# EAGLE board 16-Sensors(Board) (EAGLE 7.1.0)
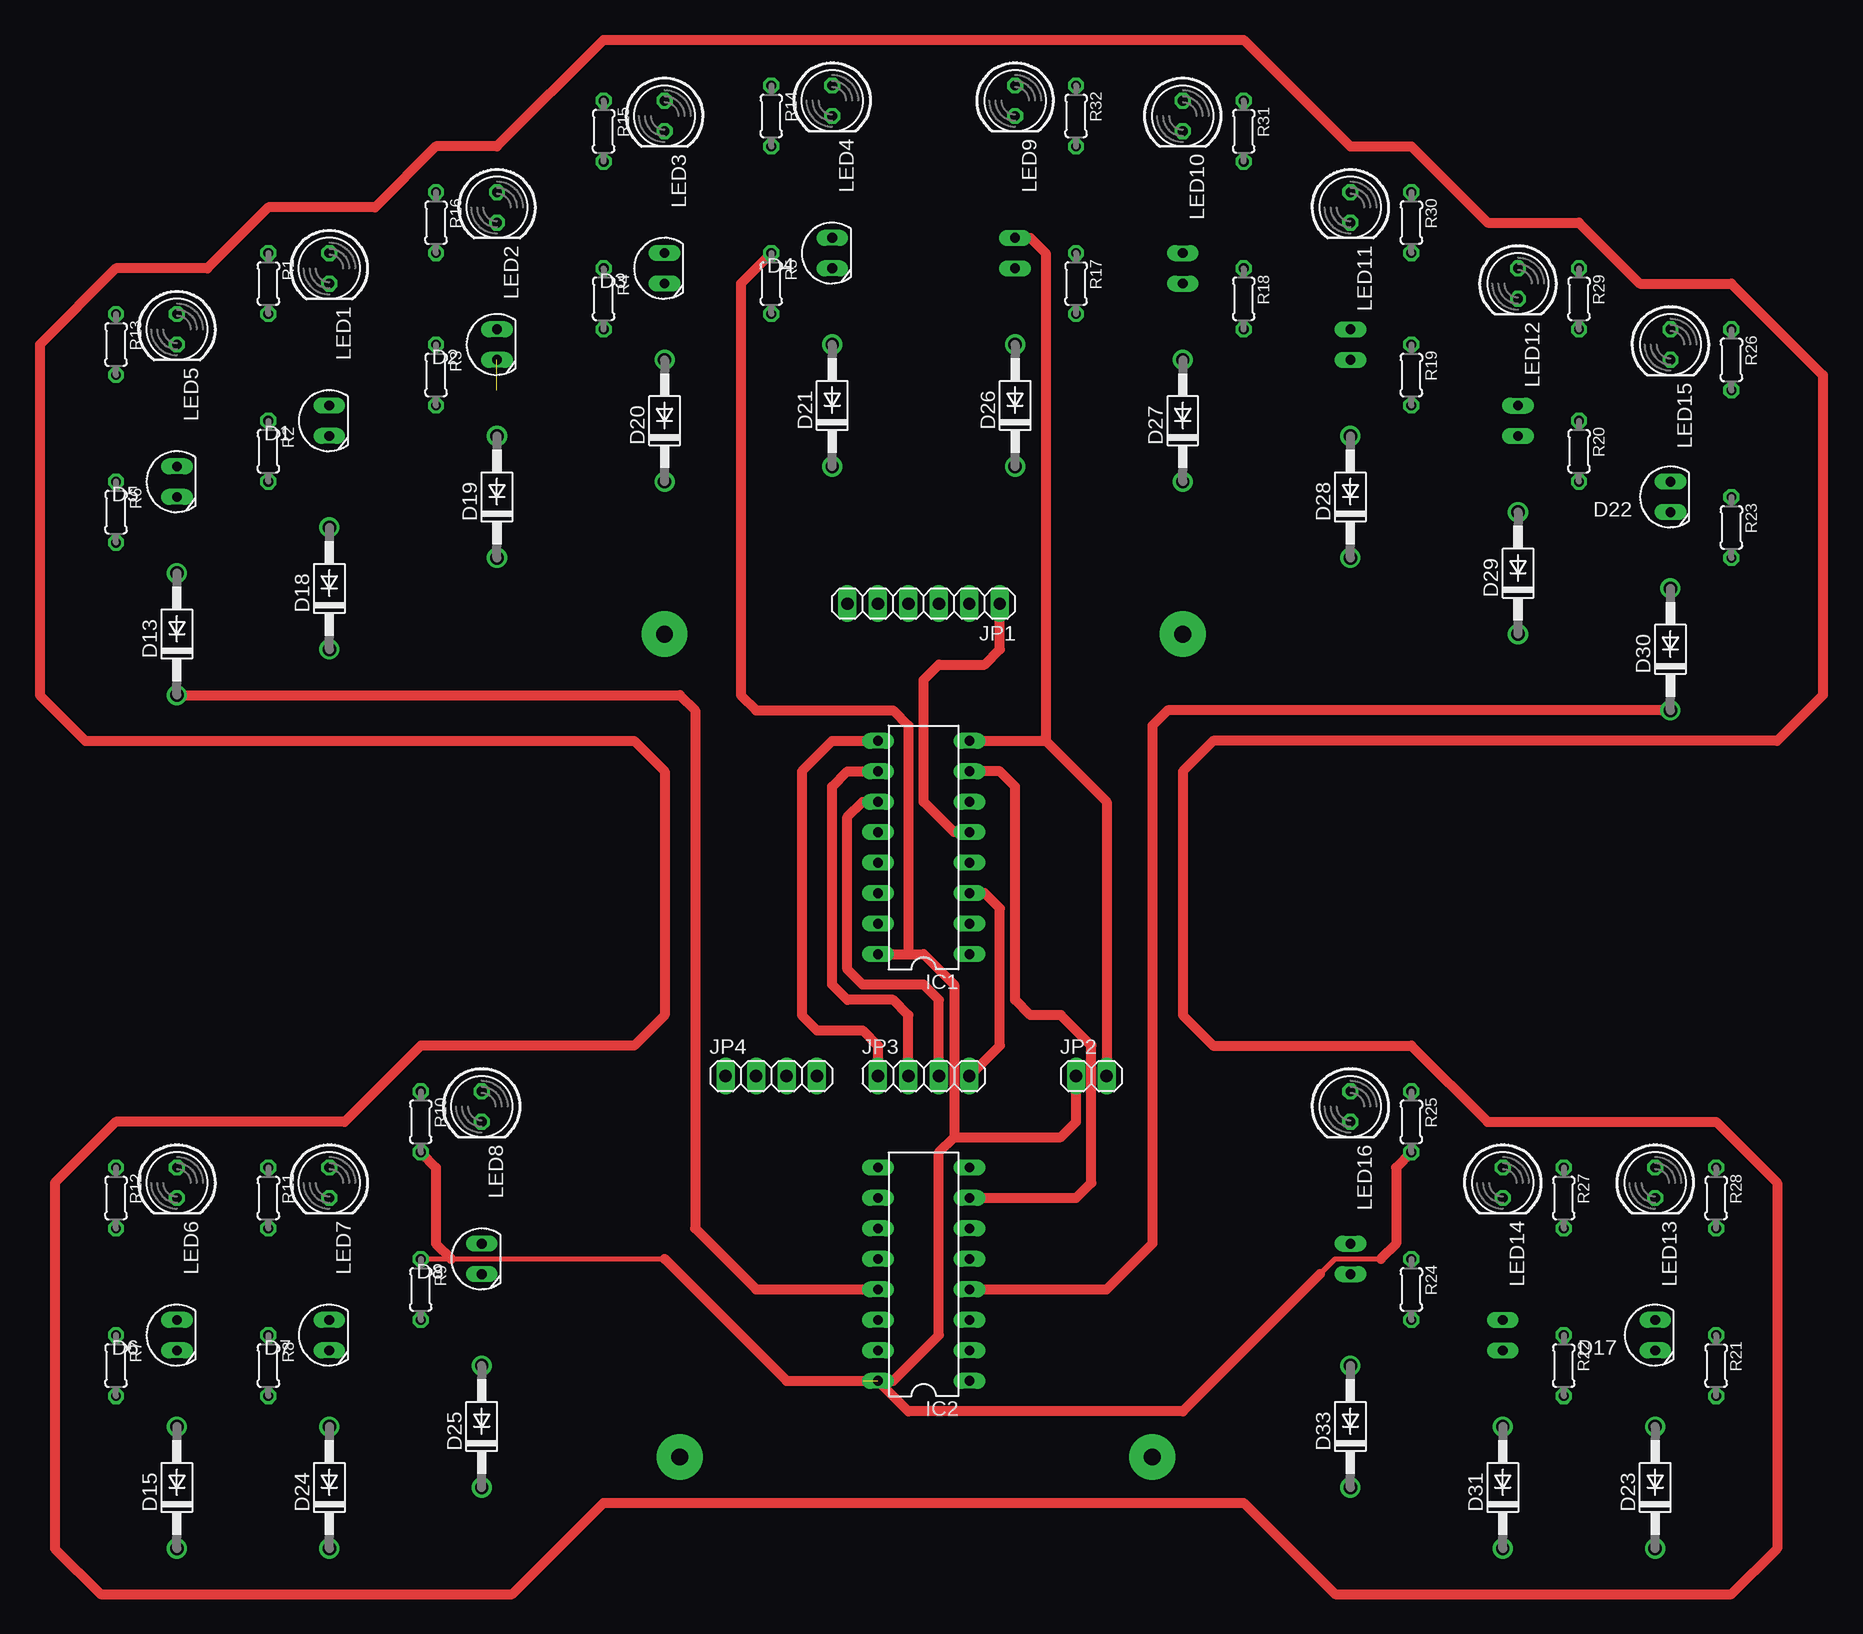
[diagram p0: board, top side]
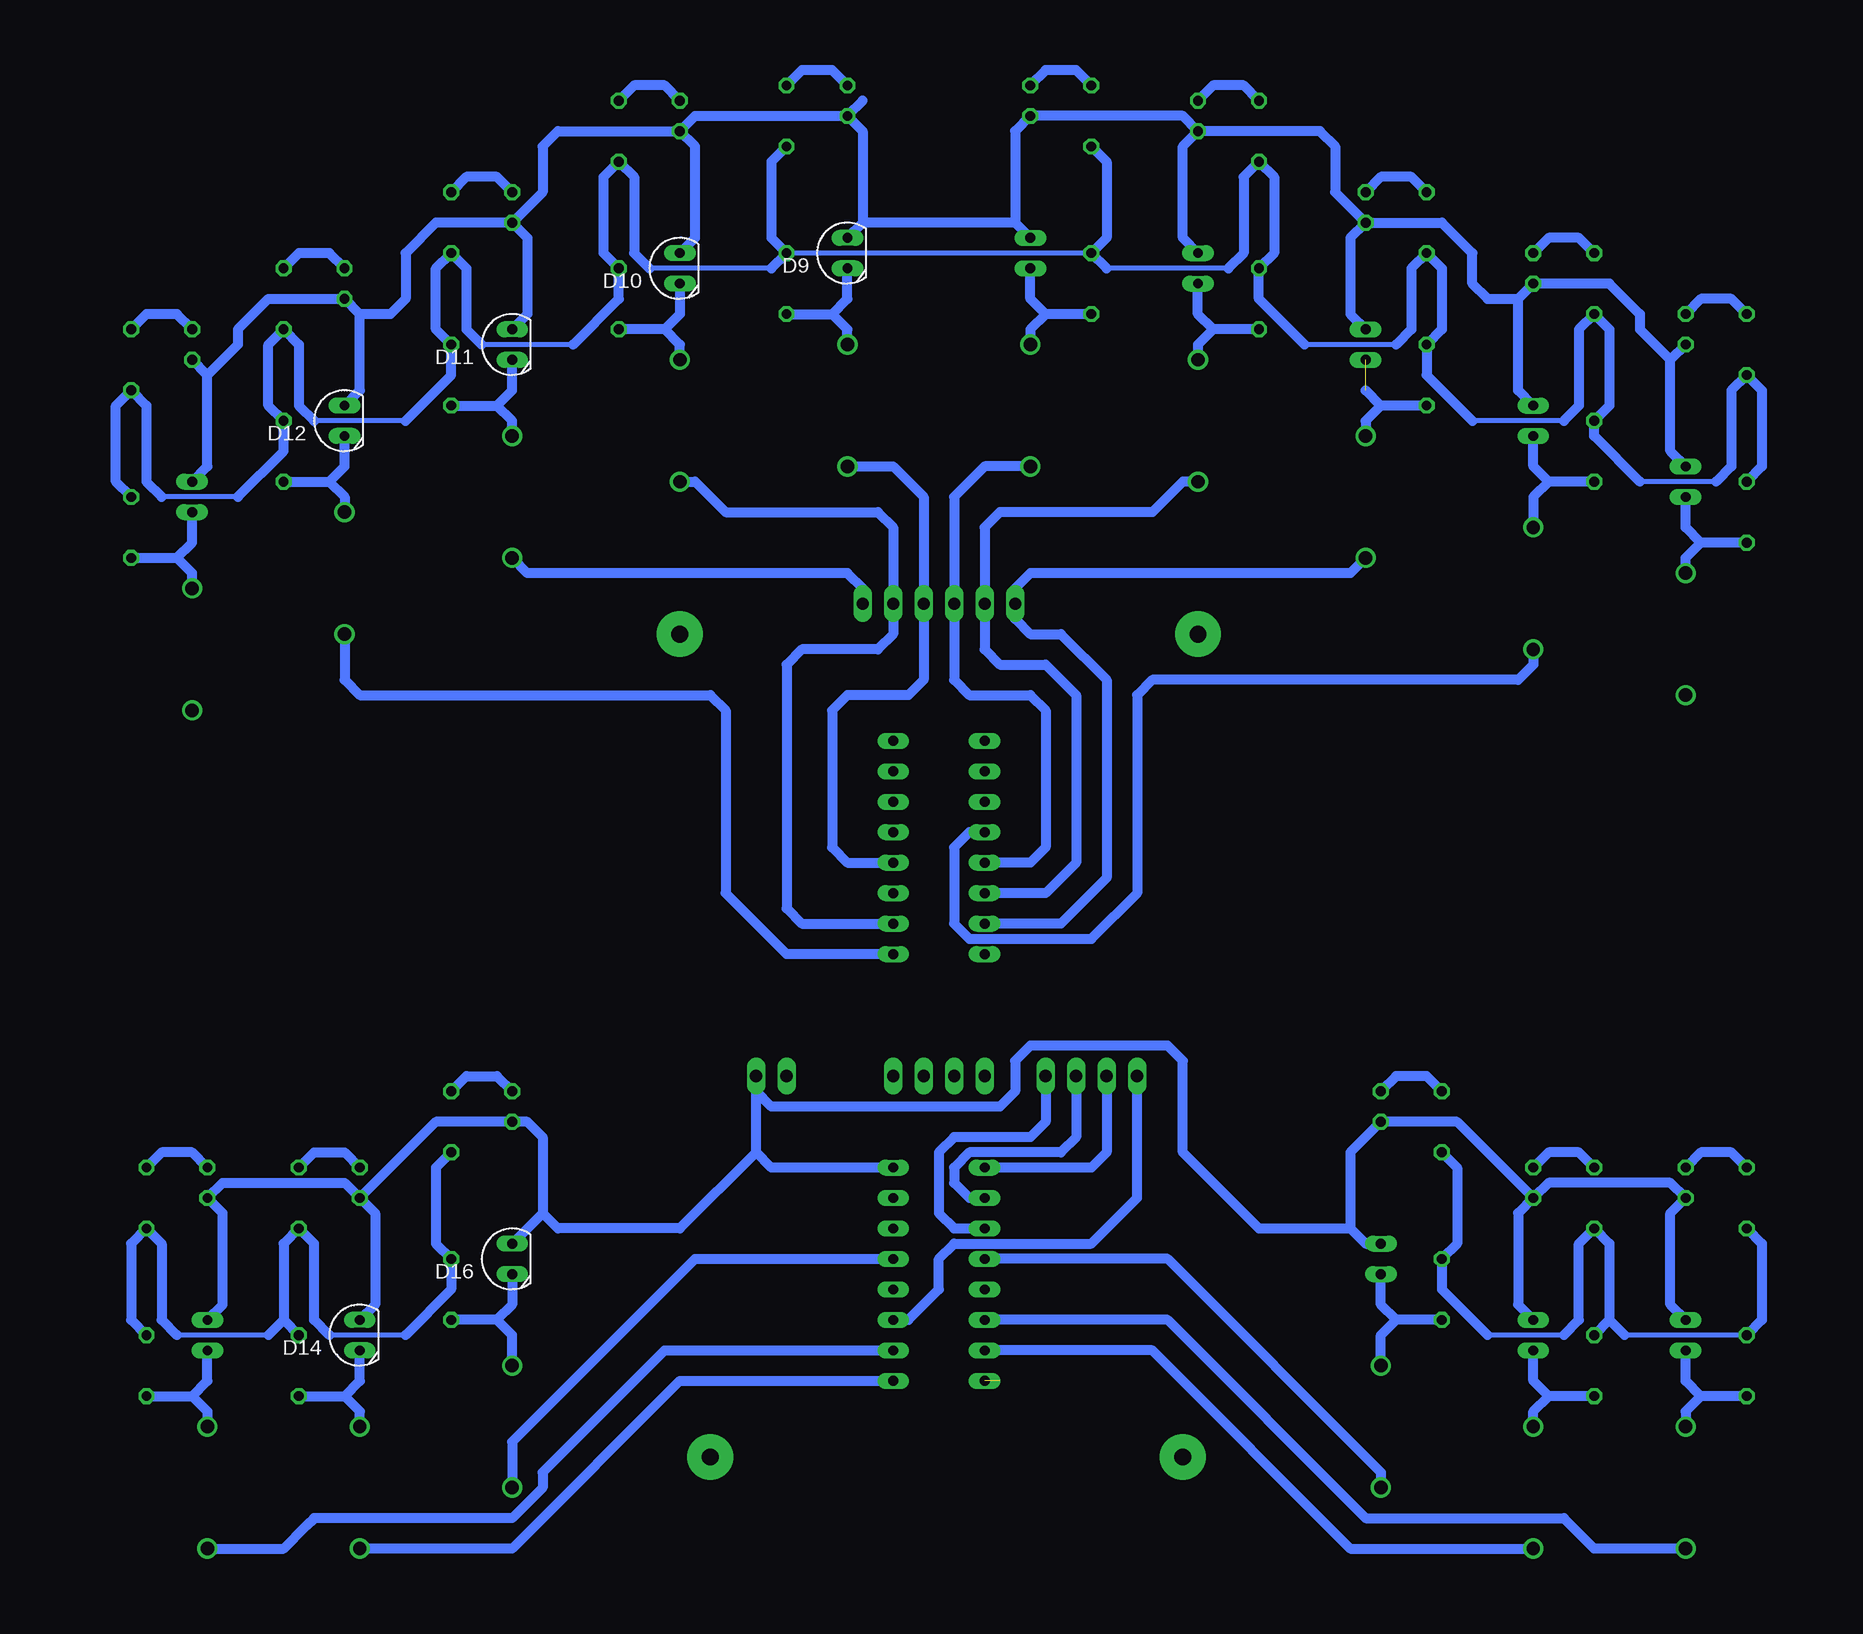
[diagram p1: board, bottom side, seen from below]

No outline drawn. Coordinates in mm, seen from the top.
Copper layers (1*16): Top 0.035mm / dielectric 1.5mm / Bottom 0.035mm
Design rules "default": minimum track width 10mil, minimum drill 24mil, track to track 8mil, track to pad 8mil, pad to pad 8mil, via to via 8mil, smd to smd 8mil, copper to edge 40mil, drill to drill 8mil, minimum pad ring 10mil, minimum via ring 8mil, stop-mask expansion 4mil, vias tented up to drill 0mil, thermal gap 10mil

## Footprints (pad centres in the part's own frame; a part is rotated, then mirrored left to right if it is on the bottom)
SFH205 = drill 0.813 long: A 0,-1.27; K 0,1.27
DO41-10 = drill 1.118: A 5.08,0; C -5.08,0
DIL16 = drill 0.813 long: 1 -8.89,-3.81; 2 -6.35,-3.81; 3 -3.81,-3.81; 4 -1.27,-3.81; 5 1.27,-3.81; 6 3.81,-3.81; 7 6.35,-3.81; 8 8.89,-3.81; 9 8.89,3.81; 10 6.35,3.81; 11 3.81,3.81; 12 1.27,3.81; 13 -1.27,3.81; 14 -3.81,3.81; 15 -6.35,3.81; 16 -8.89,3.81
1X06 = drill 1.016 long: 1 -6.35,0; 2 -3.81,0; 3 -1.27,0; 4 1.27,0; 5 3.81,0; 6 6.35,0
1X02 = drill 1.016 long: 1 -1.27,0; 2 1.27,0
1X04 = drill 1.016 long: 1 -3.81,0; 2 -1.27,0; 3 1.27,0; 4 3.81,0
LED5MM = drill 0.813 octagon: A -1.27,0; K 1.27,0
0204/5 = drill 0.813 octagon: 1 -2.54,0; 2 2.54,0

## Placement (x,y rotation side)
D1  SFH205  [SFH205]  30.48,64.77 180 top
D2  SFH205  [SFH205]  44.45,71.12 180 top
D3  SFH205  [SFH205]  58.42,77.47 180 top
D4  SFH205  [SFH205]  72.39,78.74 180 top
D5  SFH205  [SFH205]  17.78,59.69 180 top
D6  SFH205  [SFH205]  17.78,-11.43 180 top
D7  SFH205  [SFH205]  30.48,-11.43 180 top
D8  SFH205  [SFH205]  43.18,-5.08 180 top
D9  SFH205  [SFH205]  87.63,78.74 180 bottom
D10  SFH205  [SFH205]  101.6,77.47 180 bottom
D11  SFH205  [SFH205]  115.57,71.12 180 bottom
D12  SFH205  [SFH205]  129.54,64.77 180 bottom
D13  1N4004  [DO41-10]  17.78,46.99 90 top
D14  SFH205  [SFH205]  128.27,-11.43 180 bottom
D15  1N4004  [DO41-10]  17.78,-24.13 90 top
D16  SFH205  [SFH205]  115.57,-5.08 180 bottom
D17  SFH205  [SFH205]  140.97,-11.43 180 top
D18  1N4004  [DO41-10]  30.48,50.8 90 top
D19  1N4004  [DO41-10]  44.45,58.42 90 top
D20  1N4004  [DO41-10]  58.42,64.77 90 top
D21  1N4004  [DO41-10]  72.39,66.04 90 top
D22  SFH205  [SFH205]  142.24,58.42 180 top
D23  1N4004  [DO41-10]  140.97,-24.13 90 top
D24  1N4004  [DO41-10]  30.48,-24.13 90 top
D25  1N4004  [DO41-10]  43.18,-19.05 90 top
D26  1N4004  [DO41-10]  87.63,66.04 90 top
D27  1N4004  [DO41-10]  101.6,64.77 90 top
D28  1N4004  [DO41-10]  115.57,58.42 90 top
D29  1N4004  [DO41-10]  129.54,52.07 90 top
D30  1N4004  [DO41-10]  142.24,45.72 90 top
D31  1N4004  [DO41-10]  128.27,-24.13 90 top
D33  1N4004  [DO41-10]  115.57,-19.05 90 top
IC1  4051N  [DIL16]  80.01,29.21 90 top
IC2  4051N  [DIL16]  80.01,-6.35 90 top
JP1  [1X06]  80.01,49.53 180 top
JP2  [1X02]  93.98,10.16 0 top
JP3  [1X04]  80.01,10.16 0 top
JP4  [1X04]  67.31,10.16 0 top
LED1  [LED5MM]  30.48,77.47 270 top
LED2  [LED5MM]  44.45,82.55 270 top
LED3  [LED5MM]  58.42,90.17 270 top
LED4  [LED5MM]  72.39,91.44 270 top
LED5  [LED5MM]  17.78,72.39 270 top
LED6  [LED5MM]  17.78,1.27 270 top
LED7  [LED5MM]  30.48,1.27 270 top
LED8  [LED5MM]  43.18,7.62 270 top
LED9  [LED5MM]  87.63,91.44 270 top
LED10  [LED5MM]  101.6,90.17 270 top
LED11  [LED5MM]  115.57,82.55 270 top
LED12  [LED5MM]  129.54,76.2 270 top
LED13  [LED5MM]  140.97,1.27 270 top
LED14  [LED5MM]  128.27,1.27 270 top
LED15  [LED5MM]  142.24,71.12 270 top
LED16  [LED5MM]  115.57,7.62 270 top
R1  [0204/5]  25.4,76.2 270 top
R2  [0204/5]  25.4,62.23 270 top
R3  [0204/5]  39.37,68.58 270 top
R4  [0204/5]  53.34,74.93 270 top
R5  [0204/5]  67.31,76.2 270 top
R6  [0204/5]  12.7,57.15 270 top
R7  [0204/5]  12.7,-13.97 270 top
R8  [0204/5]  25.4,-13.97 270 top
R9  [0204/5]  38.1,-7.62 270 top
R10  [0204/5]  38.1,6.35 270 top
R11  [0204/5]  25.4,0 270 top
R12  [0204/5]  12.7,0 270 top
R13  [0204/5]  12.7,71.12 270 top
R14  [0204/5]  67.31,90.17 270 top
R15  [0204/5]  53.34,88.9 270 top
R16  [0204/5]  39.37,81.28 270 top
R17  [0204/5]  92.71,76.2 270 top
R18  [0204/5]  106.68,74.93 270 top
R19  [0204/5]  120.65,68.58 270 top
R20  [0204/5]  134.62,62.23 270 top
R21  [0204/5]  146.05,-13.97 270 top
R22  [0204/5]  133.35,-13.97 270 top
R23  [0204/5]  147.32,55.88 270 top
R24  [0204/5]  120.65,-7.62 270 top
R25  [0204/5]  120.65,6.35 270 top
R26  [0204/5]  147.32,69.85 270 top
R27  [0204/5]  133.35,0 270 top
R28  [0204/5]  146.05,0 270 top
R29  [0204/5]  134.62,74.93 270 top
R30  [0204/5]  120.65,81.28 270 top
R31  [0204/5]  106.68,88.9 270 top
R32  [0204/5]  92.71,90.17 270 top

## Library data of the parts
D1-D12 D14 D16 D17 D22 = opto-trans-siemens; OC_FARNELL: unknown; OC_NEWARK: unknown
D13 D15 D18-D21 D23-D31 D33 = diode
IC1 IC2 = 40xx
JP1-JP4 = pinhead
LED1-LED16 = led
R1-R32 = rcl

## Nets
GND: D1.A D2.A D3.A D4.A D5.A D6.A D7.A D8.A D9.A D10.A D11.A D12.A D14.A D16.A D17.A D22.A IC1.8 IC2.8 JP2.2 LED1.K LED2.K LED3.K LED4.K LED5.K LED6.K LED7.K LED8.K LED9.K LED10.K LED11.K LED12.K LED13.K LED14.K LED15.K LED16.K
N$1: LED9.A R32.1
N$2: LED10.A R31.1
N$3: LED11.A R30.1
N$4: LED12.A R29.1
N$5: D26.C IC1.4 JP1.3
N$6: LED14.A R27.1
N$7: D21.C IC1.13 JP1.4
N$8: D20.C IC1.14 JP1.5
N$9: LED1.A R1.1
N$10: LED2.A R16.1
N$11: LED3.A R15.1
N$12: LED4.A R14.1
N$13: D27.C IC1.2 JP1.2
N$14: D19.C IC1.15 JP1.6
N$15: D18.C IC1.12
N$17: D28.C IC1.5 JP1.1
N$18: D3.K D20.A R4.2
N$19: IC1.3 JP3.4
N$20: D29.C IC1.1
N$21: IC1.11 JP3.3
N$22: IC1.10 JP3.2
N$23: LED5.A R13.1
N$24: IC1.9 JP3.1
N$25: LED7.A R11.1
N$26: LED8.A R10.1
N$27: D5.K D13.A R6.2
N$28: D6.K D15.A R7.2
N$29: LED6.A R12.1
N$30: LED13.A R28.1
N$31: D17.K D23.A R21.2
N$32: D16.K D33.A R24.2
N$33: D22.K D30.A R23.2
N$34: LED15.A R26.1
N$35: D31.C IC2.1
N$36: D33.C IC2.5
N$38: D30.C IC2.4
N$39: D25.C IC2.12
N$40: D24.C IC2.15
N$41: D15.C IC2.14
N$42: D13.C IC2.13
N$43: IC2.3 JP4.1
N$44: IC2.9 JP4.2
N$45: IC2.10 JP4.3
N$46: IC2.11 JP4.4
N$47: D1.K D18.A R2.2
N$48: D2.K D19.A R3.2
N$49: D23.C IC2.2
N$50: D4.K D21.A R5.2
N$53: D7.K D24.A R8.2
N$54: D8.K D25.A R9.2
N$55: D9.K D26.A R17.2
N$56: D10.K D27.A R18.2
N$57: D11.K D28.A R19.2
N$58: D12.K D29.A R20.2
N$60: D14.K D31.A R22.2
N$62: LED16.A R25.1
VCC: IC1.16 IC2.16 JP2.1 R1.2 R2.1 R3.1 R4.1 R5.1 R6.1 R7.1 R8.1 R9.1 R10.2 R11.2 R12.2 R13.2 R14.2 R15.2 R16.2 R17.1 R18.1 R19.1 R20.1 R21.1 R22.1 R23.1 R24.1 R25.2 R26.2 R27.2 R28.2 R29.2 R30.2 R31.2 R32.2
VEE: IC1.7 IC2.7

## Tracks (layer width: path | path; a pad name or v marks a point on that pad's centre or on a via)
GND
  Top 0.813: IC1.8 90.17,38.1 | 90.17,38.1 95.25,33.02 JP2.2 | D9.A 88.9,80.01 90.17,78.74 90.17,38.1
  Bottom 0.813: D11.A 114.3,73.66 114.3,80.01 LED11.K | D10.A 100.33,80.01 100.33,87.63 LED10.K | LED9.K 86.36,88.9 86.36,81.28 | 86.36,81.28 D9.A | 73.66,81.28 73.66,88.9 LED4.K 59.69,90.17 LED3.K | 73.66,81.28 D4.A | D3.A 59.69,80.01 59.69,87.63 LED3.K | D2.A 45.72,73.66 45.72,80.01 LED2.K | LED3.K 48.26,88.9 46.99,87.63 46.99,83.82 LED2.K | 86.36,91.44 LED9.K | LED10.K 111.76,88.9 113.03,87.63 113.03,83.82 LED11.K | LED10.K 100.33,90.17 LED9.K | LED7.K 31.75,-1.27 31.75,-8.89 D7.A | LED14.K 127,-1.27 127,-8.89 D14.A | D1.A 31.75,67.31 31.75,74.93 | 31.75,74.93 LED1.K 24.13,76.2 21.59,73.66 21.59,72.39 19.05,69.85 | D12.A 128.27,67.31 128.27,73.66 | 128.27,73.66 LED12.K 135.89,74.93 138.43,72.39 138.43,71.12 140.97,68.58 | LED7.K 36.83,6.35 LED8.K 45.72,3.81 45.72,-2.54 | LED14.K 121.92,6.35 LED16.K 114.3,6.35 113.03,5.08 113.03,-1.27 | 128.27,73.66 125.73,73.66 124.46,74.93 124.46,78.74 121.92,81.28 LED11.K | D16.A 113.03,-1.27 | 45.72,-2.54 44.45,-3.81 D8.A | D6.A 19.05,-8.89 19.05,-1.27 LED6.K 19.05,1.27 29.21,1.27 LED7.K | LED5.K 19.05,69.85 | D5.A 19.05,62.23 19.05,69.85 | D22.A 140.97,60.96 140.97,68.58 | 140.97,68.58 LED15.K | D17.A 139.7,-8.89 139.7,-1.27 LED13.K 139.7,1.27 129.54,1.27 LED14.K | 73.66,81.28 86.36,81.28 | IC2.8 93.98,2.54 95.25,3.81 | 95.25,3.81 95.25,8.89 | 95.25,8.89 JP2.2 | 113.03,-1.27 111.76,-2.54 101.6,-2.54 95.25,3.81 | 95.25,8.89 93.98,7.62 74.93,7.62 73.66,8.89 73.66,11.43 72.39,12.7 60.96,12.7 59.69,11.43 59.69,3.81 53.34,-2.54 45.72,-2.54 | LED2.K 38.1,81.28 35.56,78.74 35.56,76.2 34.29,74.93 31.75,74.93
N$1
  Bottom 0.813: LED9.A 88.9,93.98 91.44,93.98 R32.1
N$2
  Bottom 0.813: LED10.A 102.87,92.71 105.41,92.71 R31.1
N$3
  Bottom 0.813: LED11.A 116.84,85.09 119.38,85.09 R30.1
N$4
  Bottom 0.813: LED12.A 130.81,78.74 133.35,78.74 R29.1
N$5
  Bottom 0.813: D26.C 83.82,60.96 81.28,58.42 JP1.3 81.28,43.18 82.55,41.91 87.63,41.91 88.9,40.64 88.9,29.21 87.63,27.94 IC1.4
N$6
  Bottom 0.813: R27.1 132.08,3.81 129.54,3.81 LED14.A
N$7
  Bottom 0.813: D21.C 76.2,60.96 78.74,58.42 JP1.4 78.74,43.18 77.47,41.91 72.39,41.91 71.12,40.64 71.12,29.21 72.39,27.94 IC1.13
N$8
  Bottom 0.813: D20.C 59.69,59.69 62.23,57.15 74.93,57.15 76.2,55.88 JP1.5 76.2,45.72 74.93,44.45 71.12,44.45 68.58,41.91 68.58,27.94 71.12,25.4 IC1.14
N$9
  Bottom 0.813: R1.1 26.67,80.01 29.21,80.01 LED1.A
N$10
  Bottom 0.813: R16.1 40.64,85.09 43.18,85.09 LED2.A
N$11
  Bottom 0.813: R15.1 54.61,92.71 57.15,92.71 LED3.A
N$12
  Bottom 0.813: R14.1 68.58,93.98 71.12,93.98 LED4.A
N$13
  Bottom 0.813: D27.C 100.33,59.69 97.79,57.15 85.09,57.15 83.82,55.88 JP1.2 83.82,46.99 85.09,45.72 91.44,45.72 92.71,44.45 92.71,24.13 91.44,22.86 IC1.2
N$14
  Bottom 0.813: D19.C 45.72,52.07 72.39,52.07 73.66,50.8 JP1.6 73.66,48.26 72.39,46.99 69.85,46.99 66.04,43.18 66.04,26.67 69.85,22.86 IC1.15
N$15
  Bottom 0.813: IC1.12 77.47,30.48 78.74,29.21 78.74,22.86 77.47,21.59 67.31,21.59 63.5,25.4 63.5,41.91 62.23,43.18 31.75,43.18 30.48,44.45 D18.C
N$17
  Top 0.813: IC1.5 82.55,30.48 80.01,33.02 80.01,43.18 81.28,44.45 85.09,44.45 86.36,45.72 JP1.1
  Bottom 0.813: D28.C 114.3,52.07 87.63,52.07 86.36,50.8 JP1.1
N$18
  Bottom 0.813: R4.2 57.15,72.39 | 57.15,72.39 58.42,73.66 D3.K | 57.15,72.39 58.42,71.12 D20.A
N$19
  Top 0.813: JP3.4 86.36,12.7 86.36,24.13 85.09,25.4 IC1.3
N$20
  Bottom 0.813: IC1.1 92.71,20.32 97.79,25.4 97.79,40.64 99.06,41.91 128.27,41.91 129.54,43.18 D29.C
N$21
  Top 0.813: JP3.3 81.28,16.51 80.01,17.78 74.93,17.78 73.66,19.05 73.66,31.75 74.93,33.02 IC1.11
N$22
  Top 0.813: JP3.2 78.74,15.24 77.47,16.51 73.66,16.51 72.39,17.78 72.39,34.29 73.66,35.56 IC1.10
N$23
  Bottom 0.813: R13.1 13.97,74.93 16.51,74.93 LED5.A
N$24
  Top 0.813: JP3.1 76.2,12.7 74.93,13.97 71.12,13.97 69.85,15.24 69.85,35.56 72.39,38.1 IC1.9
N$25
  Bottom 0.813: R11.1 26.67,3.81 29.21,3.81 LED7.A
N$26
  Bottom 0.813: R10.1 39.37,10.16 41.91,10.16 LED8.A
N$27
  Bottom 0.813: R6.2 16.51,54.61 | 16.51,54.61 17.78,55.88 D5.K | D13.A 17.78,53.34 16.51,54.61
N$28
  Bottom 0.813: R7.2 16.51,-16.51 | 16.51,-16.51 17.78,-15.24 D6.K | 16.51,-16.51 17.78,-17.78 D15.A
N$29
  Bottom 0.813: R12.1 13.97,3.81 16.51,3.81 LED6.A
N$30
  Bottom 0.813: LED13.A 142.24,3.81 144.78,3.81 R28.1
N$31
  Bottom 0.813: R21.2 142.24,-16.51 | 142.24,-16.51 140.97,-15.24 D17.K | 142.24,-16.51 140.97,-17.78 D23.A
N$32
  Bottom 0.813: D16.K 115.57,-8.89 116.84,-10.16 | 116.84,-10.16 R24.2 | D33.A 115.57,-11.43 116.84,-10.16
N$33
  Bottom 0.813: R23.2 143.51,53.34 | 143.51,53.34 142.24,54.61 D22.K | D30.A 142.24,52.07 143.51,53.34
N$34
  Bottom 0.813: LED15.A 143.51,73.66 146.05,73.66 R26.1
N$35
  Bottom 0.813: IC2.1 101.6,-15.24 115.57,-29.21 D31.C
N$36
  Bottom 0.813: IC2.5 100.33,-5.08 115.57,-20.32 D33.C
N$37
  Top 0.813: 53.34,96.52 106.68,96.52 115.57,87.63 120.65,87.63 127,81.28 134.62,81.28 139.7,76.2 147.32,76.2 154.94,68.58 154.94,41.91 151.13,38.1 104.14,38.1 101.6,35.56 101.6,15.24 104.14,12.7 120.65,12.7 127,6.35 146.05,6.35 151.13,1.27 151.13,-29.21 147.32,-33.02 114.3,-33.02 106.68,-25.4 53.34,-25.4 45.72,-33.02 11.43,-33.02 7.62,-29.21 7.62,1.27 12.7,6.35 31.75,6.35 38.1,12.7 55.88,12.7 58.42,15.24 58.42,35.56 55.88,38.1 10.16,38.1 6.35,41.91 6.35,71.12 12.7,77.47 20.32,77.47 25.4,82.55 34.29,82.55 39.37,87.63 44.45,87.63 53.34,96.52
N$38
  Top 0.813: IC2.4 95.25,-7.62 99.06,-3.81 99.06,39.37 100.33,40.64 D30.C
N$39
  Bottom 0.813: IC2.12 60.96,-5.08 43.18,-22.86 D25.C
N$40
  Bottom 0.813: IC2.15 62.23,-12.7 45.72,-29.21 D24.C
N$41
  Bottom 0.813: D15.C 25.4,-29.21 27.94,-26.67 44.45,-26.67 60.96,-10.16 IC2.14
N$42
  Top 0.813: IC2.13 66.04,-7.62 60.96,-2.54 60.96,40.64 59.69,41.91 D13.C
N$43
  Bottom 0.813: IC2.3 82.55,-10.16 80.01,-7.62 80.01,-5.08 78.74,-3.81 67.31,-3.81 63.5,0 JP4.1
N$44
  Bottom 0.813: JP4.2 66.04,3.81 67.31,2.54 IC2.9
N$45
  Bottom 0.813: JP4.3 68.58,5.08 69.85,3.81 77.47,3.81 78.74,2.54 78.74,1.27 77.47,0 IC2.10
N$46
  Bottom 0.813: JP4.4 71.12,6.35 72.39,5.08 78.74,5.08 80.01,3.81 80.01,-1.27 78.74,-2.54 IC2.11
N$47
  Bottom 0.813: R2.2 29.21,59.69 | 29.21,59.69 30.48,60.96 D1.K | 29.21,59.69 30.48,58.42 D18.A
N$48  (1 unrouted)
  Bottom 0.813: R3.2 43.18,66.04 | 43.18,66.04 44.45,67.31 | 43.18,66.04 44.45,64.77 D19.A
N$49
  Bottom 0.813: D23.C 134.62,-29.21 132.72,-27.3 132.08,-26.67 115.57,-26.67 113.03,-24.13 113.03,-22.86 102.87,-12.7 IC2.2
N$50
  Bottom 0.813: 71.12,73.66 72.39,74.93 D4.K | R5.2 71.12,73.66 | 71.12,73.66 72.39,72.39 D21.A
N$51  (via drill 1.4 pad 3.81)
  other vias: 58.42,46.99
N$52  (via drill 1.4 pad 3.81)
  other vias: 101.6,46.99
N$53
  Bottom 0.813: R8.2 29.21,-16.51 | 29.21,-16.51 30.48,-15.24 D7.K | D24.A 30.48,-17.78 29.21,-16.51
N$54
  Bottom 0.813: R9.2 41.91,-10.16 | 41.91,-10.16 43.18,-8.89 D8.K | D25.A 43.18,-11.43 41.91,-10.16
N$55
  Bottom 0.813: R17.2 88.9,73.66 | 88.9,73.66 87.63,74.93 D9.K | D26.A 87.63,72.39 88.9,73.66
N$56
  Bottom 0.813: D10.K 101.6,73.66 102.87,72.39 | 102.87,72.39 R18.2 | D27.A 101.6,71.12 102.87,72.39
N$57
  Bottom 0.813: R19.2 116.84,66.04 | 116.84,66.04 115.57,67.31 D11.K | D28.A 115.57,64.77 116.84,66.04
N$58
  Bottom 0.813: 130.81,59.69 129.54,60.96 D12.K | R20.2 130.81,59.69 | 130.81,59.69 129.54,58.42 D29.A
N$59  (via drill 1.4 pad 3.81)
  other vias: 99.06,-21.59
N$60
  Bottom 0.813: R22.2 129.54,-16.51 | 129.54,-16.51 128.27,-15.24 D14.K | D31.A 128.27,-17.78 129.54,-16.51
N$61  (via drill 1.4 pad 3.81)
  other vias: 59.69,-21.59
N$62
  Bottom 0.813: R25.1 119.38,10.16 116.84,10.16 LED16.A
VCC  (1 unrouted)
  Top 0.406: R9.1 58.42,-5.08 | 118.11,-5.08 114.3,-5.08 113.03,-6.35
  Top 0.813: 82.55,5.08 81.28,3.81 81.28,-11.43 77.47,-15.24 IC2.16 78.74,-17.78 101.6,-17.78 113.03,-6.35 | 82.55,5.08 91.44,5.08 92.71,6.35 JP2.1 | IC1.16 78.74,20.32 | 78.74,20.32 80.01,20.32 82.55,17.78 82.55,5.08 | R10.2 39.37,2.54 39.37,-3.81 40.64,-5.08 | 74.93,-15.24 68.58,-15.24 58.42,-5.08 | R25.2 119.38,2.54 119.38,-3.81 118.11,-5.08 | R5.1 64.77,76.2 64.77,41.91 66.04,40.64 77.47,40.64 78.74,39.37 78.74,20.32
  Bottom 0.406: 15.24,59.69 21.59,59.69 | 27.94,64.77 35.56,64.77 | 41.91,71.12 49.53,71.12 | 55.88,77.47 66.04,77.47 | R5.1 R17.1 | 93.98,77.47 104.14,77.47 | 110.49,71.12 118.11,71.12 | 124.46,64.77 132.08,64.77 | 138.43,58.42 144.78,58.42 | R7.1 22.86,-11.43 | 27.94,-11.43 34.29,-11.43 | 124.46,-11.43 130.81,-11.43 | 135.89,-11.43 143.51,-11.43
  Bottom 0.813: R32.2 93.98,86.36 93.98,80.01 R17.1 93.98,77.47 | 27.94,64.77 26.67,66.04 26.67,72.39 R1.2 24.13,72.39 24.13,66.04 R2.1 25.4,63.5 21.59,59.69 | 41.91,71.12 40.64,72.39 40.64,77.47 R16.2 38.1,77.47 38.1,72.39 R3.1 39.37,68.58 35.56,64.77 | 49.53,71.12 53.34,74.93 R4.1 52.07,78.74 52.07,85.09 R15.2 54.61,85.09 54.61,78.74 55.88,77.47 | 134.62,-10.16 134.62,-3.81 R27.2 132.08,-3.81 132.08,-10.16 130.81,-11.43 | 134.62,-10.16 R22.1 | 24.13,-10.16 24.13,-3.81 R11.2 26.67,-3.81 26.67,-10.16 27.94,-11.43 | 24.13,-10.16 R8.1 | R10.2 36.83,2.54 36.83,-3.81 R9.1 38.1,-7.62 34.29,-11.43 | R25.2 121.92,2.54 121.92,-3.81 R24.1 120.65,-7.62 124.46,-11.43 | 66.04,77.47 R5.1 66.04,80.01 66.04,86.36 R14.2 | R12.2 11.43,-3.81 11.43,-10.16 R7.1 | 22.86,-11.43 24.13,-10.16 | R6.1 11.43,60.96 11.43,67.31 R13.2 13.97,67.31 13.97,60.96 15.24,59.69 | R23.1 148.59,59.69 148.59,66.04 R26.2 146.05,66.04 146.05,59.69 144.78,58.42 | R21.1 147.32,-10.16 147.32,-3.81 R28.2 144.78,-3.81 144.78,-10.16 143.51,-11.43 | 135.89,-11.43 134.62,-10.16 | 132.08,64.77 133.35,66.04 133.35,71.12 R29.2 135.89,71.12 135.89,66.04 R20.1 134.62,62.23 138.43,58.42 | 118.11,71.12 119.38,72.39 119.38,77.47 R30.2 121.92,77.47 121.92,72.39 R19.1 120.65,68.58 124.46,64.77 | 110.49,71.12 106.68,74.93 R18.1 107.95,78.74 107.95,85.09 R31.2 105.41,85.09 105.41,78.74 104.14,77.47
VEE
  Top 0.813: IC2.7 92.71,0 93.98,1.27 93.98,12.7 91.44,15.24 88.9,15.24 87.63,16.51 87.63,34.29 86.36,35.56 IC1.7